# EAGLE board cv_pot (EAGLE 6.3)
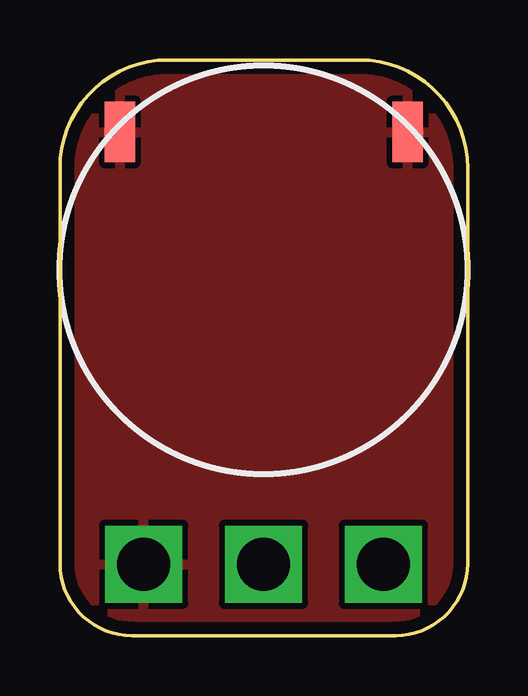
[diagram p0: board, top side]
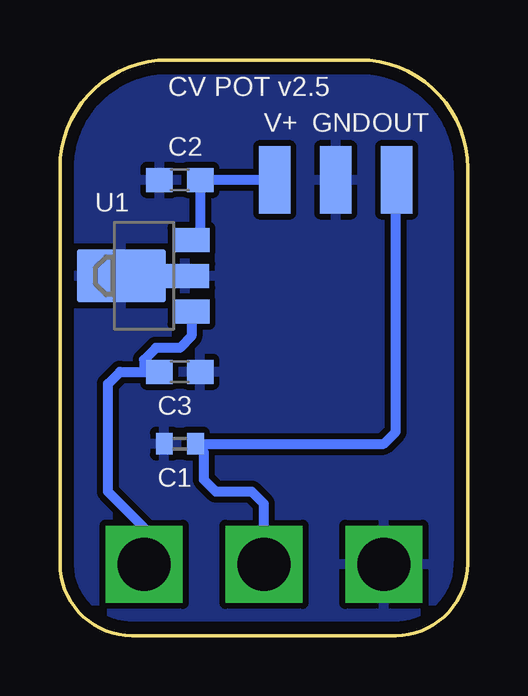
[diagram p1: board, bottom side, seen from below]

Size 17 x 24 mm. Coordinates in mm from the lower left corner, seen from the top.
Outline: 17,3 17,19.5 arc90 12.5,24 4.5,24 arc90 0,19.5 0,3 arc90 3,0 14,0 arc90 17,3
Copper layers (1*16): Top 0.035mm / dielectric 1.6mm / Bottom 0.035mm
Design rules "Elecrow_2-layer_PCB_eagle_rule": minimum track width 6mil, minimum drill 12mil, track to track 6mil, track to pad 8mil, pad to pad 12mil, via to via 12mil, smd to smd 0mil, copper to edge 20mil, drill to drill 10mil, minimum pad ring 6mil, minimum via ring 6mil, stop-mask expansion 0mil, vias tented up to drill 100mil, thermal gap 10mil

## Footprints (pad centres in the part's own frame; a part is rotated, then mirrored left to right if it is on the bottom)
C0402 = smd 0.7 x 0.9: 1 -0.65,0; 2 0.65,0
C0603 = smd 1.1 x 1: 1 -0.85,0; 2 0.85,0
SMD1,27-2,54 = smd 1.27 x 2.54: 1 0,0
3P-SMD-2.54MM = smd 1.3 x 2.8: P$1 -2.54,0; P$2 0,0; P$3 2.54,0
POT_EU_PDB181GTR = drill 2.2 square: A1 -5,0; A2 0,0; A3 5,0
SOT89 = smd 1 x 1.5: 1 -1.499,-1.981; 3 1.499,-1.981 | smd 1 x 2: 2 0,-1.727 | smd 2.2 x 3.7: 2@1 0,0.94

## Placement (x,y rotation side)
C1  0.1uF  [C0402]  12,8 180 bottom
C2  1uF  [C0603]  12,19 0 bottom
C3  1uF  [C0603]  12,11 180 bottom
GND1  [SMD1,27-2,54]  2.5,21 0 top
GND2  [SMD1,27-2,54]  14.5,21 0 top
H1  3PIN-SMD-2.54MM  [3P-SMD-2.54MM]  5.5,19 180 bottom
POT1  25K  [POT_EU_PDB181GTR]  8.49,2.97 0 top
U1  L78LXX  [SOT89]  13.5,15 90 bottom

## Library data of the parts
C1-C3 = resistor
GND1 GND2 = wirepad
H1 = CYCFI_Con
POT1 = CYCFI_Passive
U1 = CYCFI_Power

## Nets
GND: C1.2 C2.1 C3.1 GND1.1 GND2.1 H1.P$2 POT1.A1 U1.2 U1.2@1
N$1: C2.2 H1.P$3 U1.3
N$2: C3.2 POT1.A3 U1.1
OUT: C1.1 H1.P$1 POT1.A2

## Tracks (layer width: path | path; a pad name or v marks a point on that pad's centre or on a via)
GND
  pour Top (isolate 0.254): 17,3 17,19.5 arc90 12.5,24 4.5,24 arc90 0,19.5 0,3 arc90 3,0 14,0 arc90
  pour Bottom (isolate 0.254): 0,3 0,19.5 arc-90 4.5,24 12.5,24 arc-90 17,19.5 17,3 arc-90 14,0 3,0 arc-90
N$1
  Bottom 0.406: H1.P$3 C2.2 11.15,16.87 U1.3
N$2
  Bottom 0.406: U1.1 11.52,12.48 12,12 13,12 13.5,11.5 13.5,11 C3.2 14.5,11 15,10.5 15,6 13.49,4.49 POT1.A3
OUT
  Bottom 0.406: H1.P$1 3,18.96 3,8.5 3.5,8 C1.1 11,7.65 11,6.5 10.5,6 9,6 8.49,5.49 POT1.A2

## Text on the board
bNames: CV POT v2.5 | OUT | GND | V+